# Altium PCB sheet_reg.PcbDoc
Units mm, origin at the board's own origin, x right, y up, seen from the top; angles counter-clockwise.
Board outline 152.4 x 101.6 mm, 2 copper layers (Top Layer, Bottom Layer); 20 components, 7 nets, 35 pads, 0 vias.
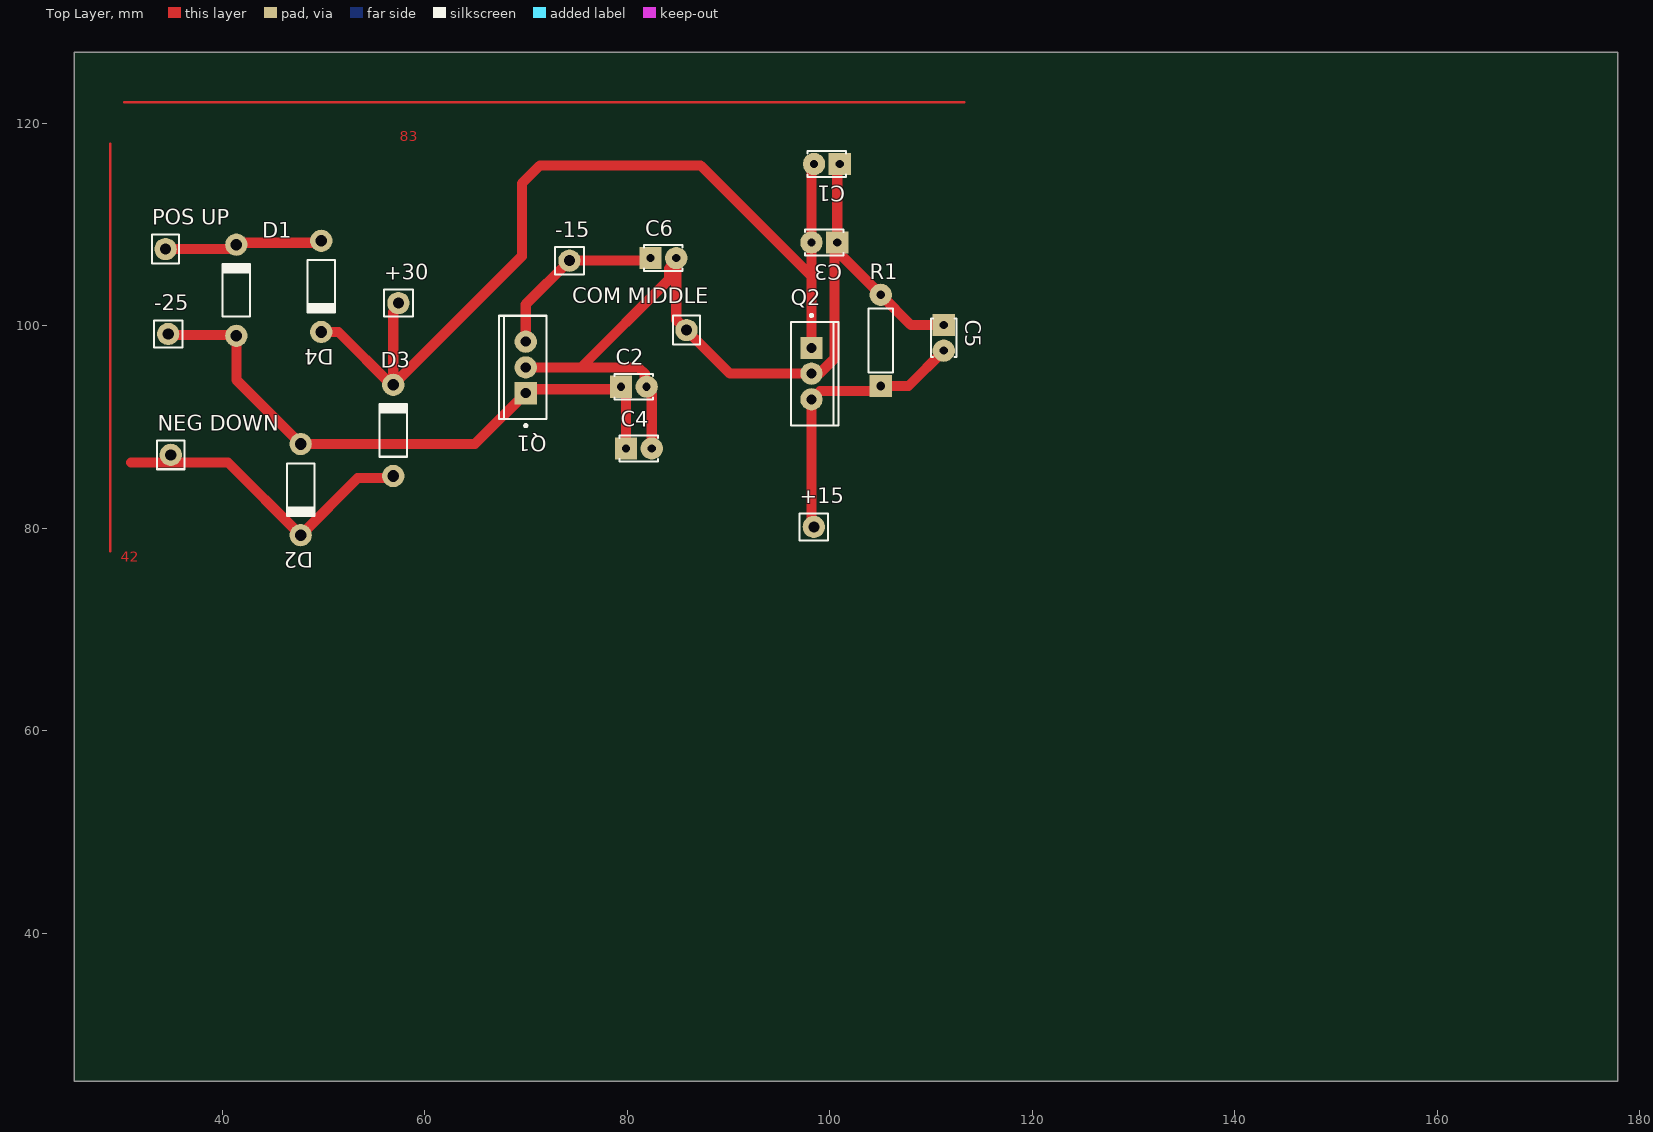
[diagram p0: Top Layer view]
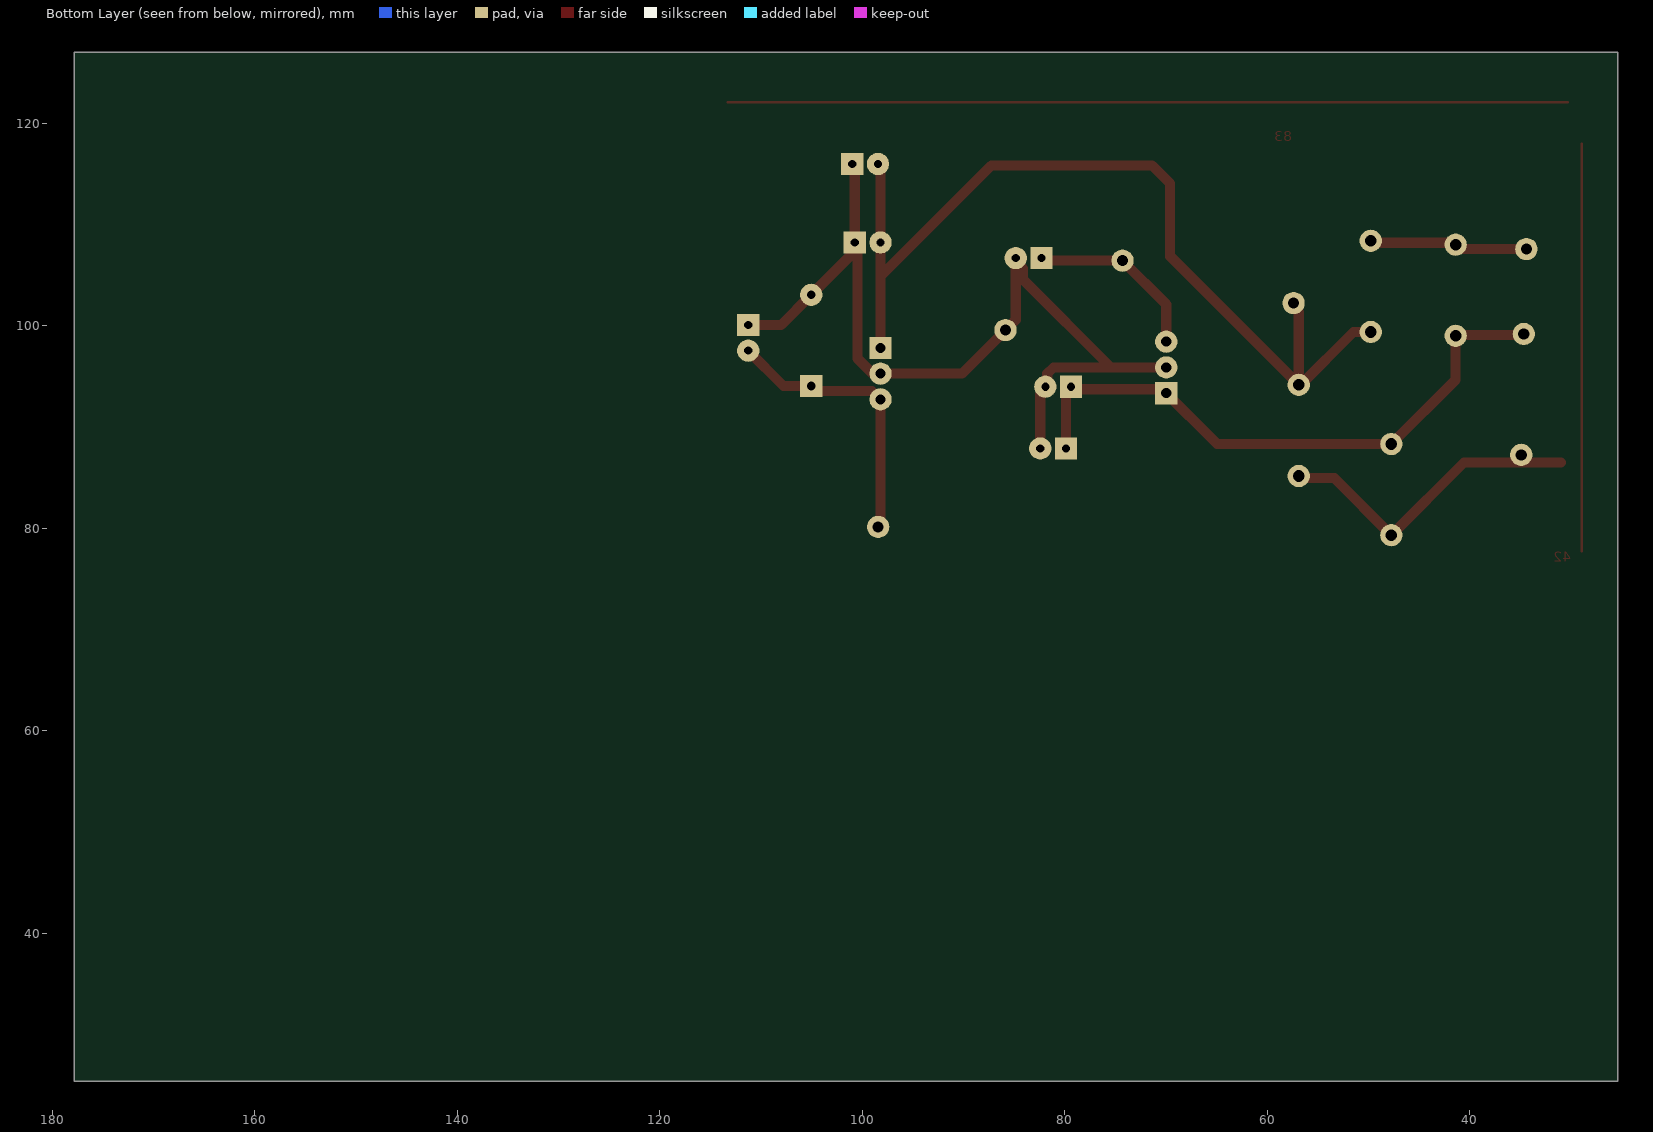
[diagram p1: Bottom Layer view, seen from below]

## Layer stack, top to bottom
Top Solder: solder mask 0.0102, Solder Resist, Dk 3.5
Top Layer: signal copper 0.0356
Dielectric 1: dielectric 0.32, FR-4, Dk 4.8
Bottom Layer: signal copper 0.0356
Bottom Solder: solder mask 0.0102, Solder Resist, Dk 3.5

## Board outline
25.4,25.4 177.8,25.4 177.8,127 25.4,127

## Design rules (kind name [scope] priority, off if disabled: settings)
Clearance [All] p1: gap=0.254 ignorepadtopadclearanceinfootprint=FALSE except(0: Arc-Hole Track-Hole SMDPad-Hole THPad-Hole Via-Hole Fill-Hole Poly-Hole Region-Hole Text-Hole)
PolygonConnect [All] p1: connectstyle=Relief reliefconductorwidth=0.254 reliefentries=4 polygonreliefangle="90 Angle" airgapwidth=0.254
RoutingVias [All] p1: holewidth=0.711 width=1.27 viastyle="Through Hole" minholewidth=0.711 minwidth=1.27 maxholewidth=0.711 maxwidth=1.27
SolderMaskExpansion [All] p1: expansion=0.102 istentingtop=FALSE
Width [All] p1: maxlimit=1 minlimit=0.254 preferedwidth=1
30 further rules are at their usual default settings.

## Components (designator, comment, footprint, x,y, rotation, side; value= is the part's Value field where it differs from the comment)
+15 "61300111121" 61300111121 98.425,80.137 r0 top
+30 "61300111121" 61300111121 57.404,102.235 r0 top
-15 "61300111121" 61300111121 74.295,106.426 r0 top
-25 "61300111121" 61300111121 34.671,99.187 r0 top
C1 "3300uF" KEMT-C315-THT-2 99.715,115.972 r180 top
C2 "2200uF" KEMT-C315-THT-2 80.645,93.98 r0 top
C3 "0.33uF" KEMT-C315-THT-2 99.461,108.225 r180 top
C4 "2.2uF" KEMT-C315-THT-2 81.153,87.884 r0 top
C5 "0.1uF" KEMT-C315-THT-2 111.252,98.806 r270 top
C6 "1uF" KEMT-C315-THT-2 83.566,106.68 r0 top
"COM MIDDLE" "61300111121" 61300111121 85.852,99.568 r90 top
D1 "1N4728A" FAIR-DO-41-2_V 41.402,103.505 r90 top
D2 "1N4728A" FAIR-DO-41-2_V 47.752,83.82 r270 top
D3 "1N4728A" FAIR-DO-41-2_V 56.896,89.662 r90 top
D4 "1N4728A" FAIR-DO-41-2_V 49.784,103.886 r270 top
"NEG DOWN" "61300111121" 61300111121 34.925,87.249 r90 top
"POS UP" "61300111121" 61300111121 34.417,107.569 r90 top
Q1 "" FAIR-TO-220-3 69.977,95.885 r180 top
Q2 "" FAIR-TO-220-3 98.191,95.271 r0 top
R1 "30" RESA60-630X240 105.029,98.552 r90 top

## Footprints (in the part's own frame and the unit in brackets; to place one, negate y for a bottom-side part, rotate by r counter-clockwise, add the part's x,y. Pads: shape width x height; smd on the part's side, far side on the other; paste and mask are expansions set on the pad)
61300111121 [mm] "Pin Header, pitch 2.54 mm, THT, Vertical, single row, 1p"
  round 2.2 hole 1.1: 1(0,0)
  silkscreen extent -1.42,-1.35 1.42,1.35, body extent -1.27,-1.27 1.27,1.27, height 8.57
FAIR-DO-41-2_V [mm] "2-Leads, Axial leaded, Body 2.72x5.2mm, Pin Spacing 9mm"
  round 2.2 hole 1.15: 1(-4.5,0) 2(4.5,0)
  silkscreen extent -2.6,-1.36 2.6,1.36, body extent -4.93,-1.36 4.93,1.36, height 2.71
FAIR-TO-220-3 [mm] "FM, 3-Leads, Body 10.2x4.7mm, Pitch 2.54mm"
  rect 2.2x2.2 hole 1: 1(0,2.54)
  round 2.2 hole 1: 2(0,0) 3(0,-2.54)
  silkscreen extent -2.04,-5.1 2.66,5.87, body extent -2.04,-5.1 2.66,5.1, height 18.95
KEMT-C315-THT-2 [mm] "THD, 2-Leads, Body 3.81x2.54mm"
  rect 2.2x2.2 hole 0.8: 1(-1.27,0)
  round 2.2 hole 0.8: 2(1.27,0)
  silkscreen extent -1.91,-1.27 1.91,1.27, body extent -1.91,-1.27 1.91,1.27, height 4.66
RESA60-630X240 [mm] "Axial Resistor, 2-Leads, Dia 2.4mm, Body Length 6.3mm"
  rect 2.2x2.2 hole 0.85: 1(-4.5,0)
  round 2.2 hole 0.85: 2(4.5,0)
  silkscreen extent -3.15,-1.2 3.15,1.2, body extent -3.15,-1.2 3.15,1.2, height 2.4

## Part data
+15 +30 -15 -25 "COM MIDDLE" "NEG DOWN" "POS UP": library part CMP-1502-01058-1, "THT Vertical Pin Header WR-PHD, Pitch 2.54 mm, Single Row, 1 pins", Contact Resistance=20mOhm, Manufacturer="Wurth Elektronik", Operating Temperature=-40to105degC, Rated Current=3A, Withstanding Voltage=500VAC, Working Voltage=250VAC, Datasheet URL=https://katalog.we-online.de/em/datasheet/6130xx11121.pdf, Gender=Male, Manufacturer URL=http://www.we-online.de, Mounting Technology=THT, Orientation=Vertical, Package Reference=61300111121, Packaging=Bag, Part Number=61300111121, Pin Number=1, Pitch=2.54mm, Publisher=WurthElektronik, Row Number=Single
C1 C2 C3 C4 C5 C6: library part CMP-1664-00007-1, "Capacitor, Ceramic, 0.01 uF, +/- 10%, 100 V, X7R, -55 to 125 degC, 2-Pin THD, RoHS, Bulk", Case\Package=PDIP, Forward Current="60 mA", Forward Voltage="1.5 V", Max Operating Temperature="100 degC", Max Power Dissipation="400 mW", Min Operating Temperature="-55 degC", Output Voltage="70 V", Package Quantity=2000, Channels=2, ComponentLink1Description="Manufacturer URL", ComponentLink1URL=http://www.kemet.com/, ComponentLink2Description=Datasheet, ComponentLink2URL=http://capacitoredge.kemet.com/capedge2/DataSheet/Datasheet-C315C103K1R5TA.pdf?pn=C315C103K1R5TA{BULK}, DatasheetVersion=Aug-16, Mount="Through Hole", Nominal Vf="1.3 V", PackageDescription="2-Pin Through Hole Device, Body 3.81 x 2.54 mm", PackageReference=C315-THT-2, Packaging=Rail/Tube, Pins=16, Radiation Hardening=No, REACH SVHC=Unknown, RoHSCompliant=true, Vce Max="500 mV"
D1 D2 D3 D4: library part CMP-0892-00028-1, "Zener Diode, 3.3V, 1W, 5%, -65 to 200 degC, 2-Pin DO-41, Body 2.72 x 5.2 mm, RoHS", Manufacturer="Fairchild Semiconductor", Operating and Storage Temperature Range="-65 to 200 degC", Test Current IZ (mA)=76, Tolerance=5%, ComponentLink1Description="Manufacturer URL", ComponentLink1URL=http://www.fairchildsemi.com/, ComponentLink2Description=Datasheet, ComponentLink2URL=http://www.fairchildsemi.com/ds/1N/1N4744A.pdf, ComponentLink3Description="Package Specification", ComponentLink3URL=http://www.fairchildsemi.com/dwg/DO/DO41A.pdf, DatasheetVersion="Rev. H3", IR (uA)=100, Mounting Technology="Through Hole", PackageDescription="2-Pin Axial leaded, Body 2.72 x 5.2 mm, Lead Spread 25.4 mm", PackageReference=DO-41-2, PackageVersion="Rev. 2", PartNumber=1N4728A, PD (W)=1, RoHS=TRUE, VZ (Max.) (V)=3.465, VZ (Min.) (V)=3.135, ZZ (Max) (ohm)=10
Q1 Q2: library part CMP-2000-04938-1, "Positive Voltage Regulator, 5 V, 1 A, -40 to 125 degC, 3-Pin TO-220, RoHS, Tube", Manufacturer=FairchildSemiconductor, Maximum Input Voltage=35V, Maximum Output Current=2.2(Typ)A, Maximum Quiescent Current=8mA, Operating Temperature=-40to125degC, Output Voltage=5V, Package=3TO-220AB, Package Description="3-Pin Through Hole Device, Body 10 x 4.5 mm, Pitch 2.54 mm", Package Reference=TO-220, Typical Dropout Voltage @ Current=2@1AV, Accuracy=±4%, Category=LinearRegulator, Datasheet URL=https://datasheet.ciiva.com/26904/lm7805ct-26904988.pdf, Datasheet Version=Aug-12, Line Regulation=100mV, Load Regulation=100mV, Manufacturer URL=https://www.fairchildsemi.com/, Mounting=ThroughHole, Number of Outputs=1, Output Type=Fixed, Package URL=https://www.fairchildsemi.com/package-drawings/TO/TO220B03.pdf, Packaging=Rail/Tube, Polarity=Positive, Rad Hard=No, Type=Linear
R1: library part CMP-1659-00075-1, "Axial Resistor, 1 KOhm, +/- 1%, 250 mW, -55 to 155 degC, 2-Pin THD, RoHS, Bulk", Case\Package=Axial, Max Operating Temperature="155 degC", Min Operating Temperature="-55 degC", Package Quantity=200, Power Rating="250 mW", Resistance="10 kohm", Tolerance=1%, Voltage Rating="250 V", ComponentLink1Description="Manufacturer URL", ComponentLink1URL=http://www.yageo.com/, ComponentLink2Description=Datasheet, ComponentLink2URL=http://www.yageo.com/documents/recent/Yageo%20LR_MFR_2013.pdf, DatasheetVersion=Apr-13, Length="0.248 inch", PackageDescription="2-Pin Axial Lead, Dia 2.4 mm, Body Length 6.3 mm", PackageReference=MFR-25, Packaging=Bulk, RoHSCompliant=true

## Nets (pads, with @x,y where several pads share a name; then routed paths per layer and width w, separated by ;. In a path a pad name is that pad's centre, name@x,y a point inside that pad or via, vN(x,y) a via of type N, cw(c..) or ccw(c..) an arc to the next point about the centre after c; other vN are vias at no path point)
Net+15_1: +15.1 C5.2 Q2.3 R1.1 | length 27.8
  Top Layer w1: +15.1@98.826,80.285 98.191,80.92 Q2.3 99.025,93.565 104.542,93.565 R1.1 107.768,94.052 C5.2
Net+30_1: +30.1 C1.2 C3.2 D3.2 D4.2 Q2.1 | length 94.8
  Top Layer w1: D4.2 51.49,99.386 D3.2@56.805,94.071 ; +30.1 57.404,101.871 56.896,101.363 D3.2 69.596,106.862 69.596,114.046 71.374,115.824 87.249,115.824 98.191,104.882 ; Q2.1 98.191,104.882 ; C1.2 98.191,115.718 C3.2 98.191,104.882
Net-15_1: -15.1 C6.1 Q1.3 | length 17.9
  Top Layer w1: Q1.3 69.977,102.108 -15.1 82.042,106.426 C6.1
Net-25_1: -25.1 C2.1 C4.1 D1.1 D2.1 Q1.1 | length 60.4
  Top Layer w1: -25.1 34.762,99.096 41.311,99.096 D1.1 41.402,94.67 D2.1 64.952,88.32 70.358,93.726 79.121,93.726 C2.1 79.883,93.472 C4.1
NetC1_1: "COM MIDDLE.1" C1.1 C2.2 C3.1 C4.2 C5.1 C6.2 Q1.2 Q2.2 R1.2 | length 92.5
  Top Layer w1: Q1.2 75.438,95.885 ; C4.2 82.423,93.201 81.915,93.709 C2.2 81.724,94.171 81.724,95.274 81.113,95.885 75.438,95.885 ; C6.2@84.836,106.409 84.836,106.355 84.15,105.669 84.15,104.597 75.438,95.885 ; C6.2 84.836,100.584 85.852,99.568 90.149,95.271 Q2.2 98.953,95.271 100.477,96.795 100.477,107.971 C3.1 ; C1.1 100.731,115.718 C3.1 ; C5.1 108.005,100.076 R1.2 100.739,107.342 100.739,108.217 C3.1
NetD1_2: "POS UP.1" D1.2 D4.1 | length 15.5
  Top Layer w1: 34.417,107.569 D1.2@41.402,107.569 ; D1.2 41.592,108.195 49.593,108.195 D4.1
NetD2_2: "NEG DOWN.1" D2.2 D3.1 | length 31.6
  Top Layer w1: 30.988,86.487 40.585,86.487 D2.2 53.395,84.963 D3.1@57.277,84.963
copper on no net: | length 123.2
  Top Layer w0.254: 28.956,77.724 28.956,117.983 ; 30.353,122.047 113.284,122.047

## Other copper
Top Layer:
  text "83" at 57.531,118.237 h1
  text "42" at 29.972,76.708 h1